# Altium PCB Monitor_Board_Model_H201.PcbDoc (part 2 of 5)
Units mm, origin at the board's own origin, x right, y up, seen from the top; angles counter-clockwise.
Board outline 50 x 40 mm, 6 copper layers (1-SIG-TOP, 2-GND, 3-PWR, 4-SIG-HOR, 5-SIG-VERT, 6-GND-BOT), stack 1.17 mm thick; 210 components, 140 nets, 699 pads, 51 vias.
Unrouted connection lines stored in the file: 491.
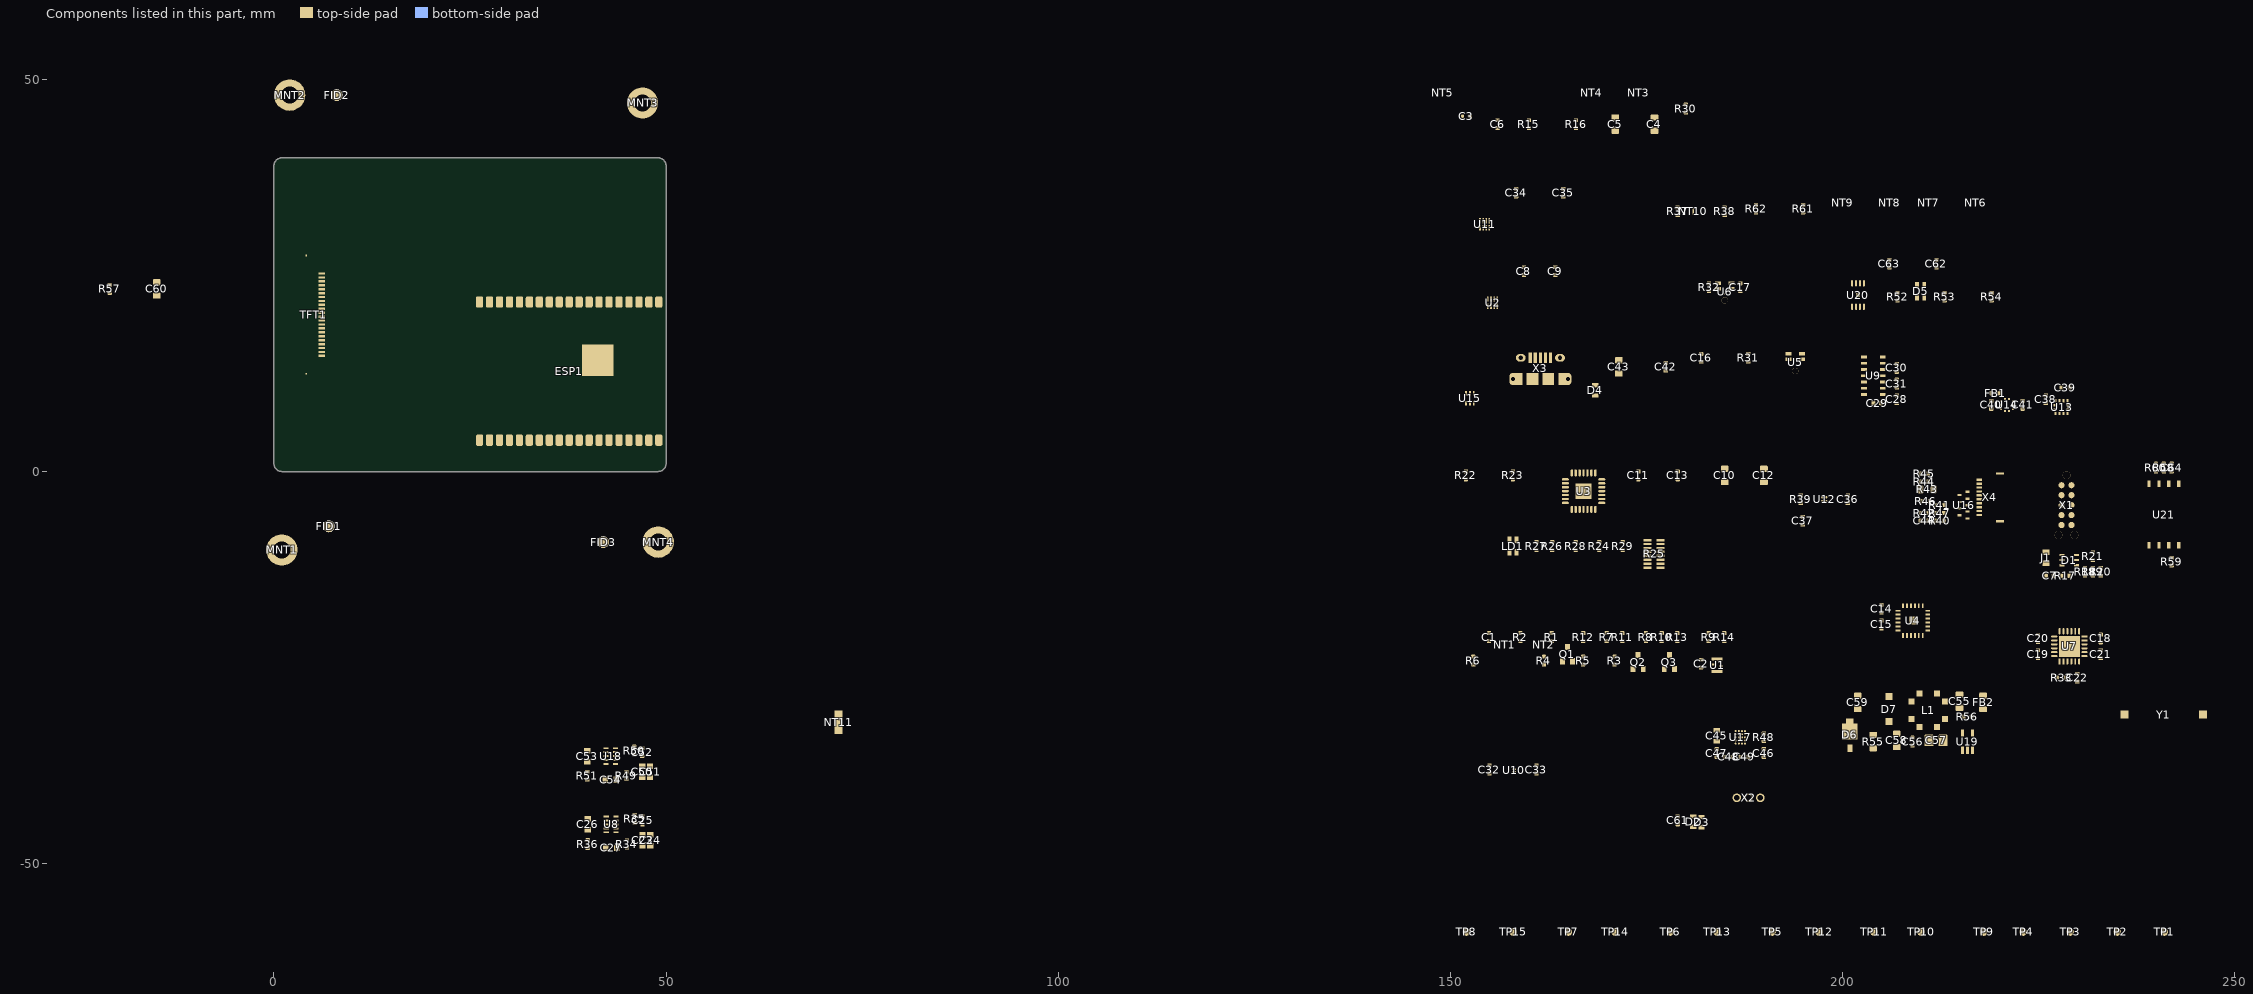
[diagram p6: the components of this part, seen from the top]

## Part data
C1 C2 C15 C16 C17 C22 C28 C30 C37 C38 C39 C44 C56 C63 C64: "0.1µF ±10% 50V Ceramic Capacitor X7R 0402 (1005 Metric)", Capacitance=100nF, Case/Package=0402, Case Code (Metric)=1005, Dielectric=X7R, Manufacturer=TDK, Manufacturer Part Number=CGA2B3X7R1H104K050BB, Max Operating Temperature=125°C, Min Operating Temperature=-55°C, Package Quantity=1, Ratings=AEC-Q200, Supplier Part Number 1=445-6899-1-ND, Tolerance=10%, Voltage=50V, Case Code (Imperial)=0402, ComponentLink1Description=http://product.tdk.com/capacitor/mlcc/en/documents/mlccspec_automotive_general_midvoltage_en.pdf?src-supplier=Future+Electronics, ComponentLink1URL=http://product.tdk.com/capacitor/mlcc/en/documents/mlccspec_automotive_general_midvoltage_en.pdf?src-supplier=Future+Electronics, ComponentLink2Description=http://www.farnell.com/datasheets/1807242.pdf?src-supplier=Element14, ComponentLink2URL=http://www.farnell.com/datasheets/1807242.pdf?src-supplier=Element14, ComponentLink3Description=http://www.mouser.com/ds/2/400/lcc_automotive_general_en-843974.pdf?src-supplier=Mouser, ComponentLink3URL=http://www.mouser.com/ds/2/400/lcc_automotive_general_en-843974.pdf?src-supplier=Mouser, ComponentLink4Description=http://www.farnell.com/datasheets/1936565.pdf?src-supplier=Element14, ComponentLink4URL=http://www.farnell.com/datasheets/1936565.pdf?src-supplier=Element14, ComponentLink5Description=http://www.farnell.com/datasheets/1735392.pdf?src-supplier=Element14, ComponentLink5URL=http://www.farnell.com/datasheets/1735392.pdf?src-supplier=Element14, Composition=Ceramic, Depth=0.5mm, Height=0.5mm, Lead Free="Lead Free", Length=1mm, Mount="Surface Mount", Packaging="Tape and Reel", Pricing 1="1=0.17, 10=0.118, 50=0.0668, 100=0.0553, 500=0.0388, 1000=0.0321, 2500=0.0299, 5000=0.0273 (USD)", REACH SVHC="No SVHC", Stock 1=2925303, Supplier 1=Digi-Key, Termination=SMD/SMT, Thickness=0.022inch, Voltage Rating=50V, Voltage Rating (DC)=50V, Weight=2.3E-05oz, Width=0.02inch
  C2: ClassName=MCU
C3 C7: "1µF ±10% 6.3V Ceramic Capacitor X5R 0402 (1005 Metric)", Capacitance=1uF, Case/Package=0402, Case Code (Metric)=1005, Dielectric=X5R, Dielectric Material=Ceramic, Manufacturer=Yageo, Manufacturer Part Number=CC0402KRX5R5BB105, Max Operating Temperature=85°C, Min Operating Temperature=-55°C, Package Quantity=1, Supplier Part Number 1=311-1438-1-ND, Tolerance=10%, Voltage Rating=6.3V, Case Code (Imperial)=0402, ComponentLink1Description=http://www.farnell.com/datasheets/70765.pdf?src-supplier=Farnell, ComponentLink1URL=http://www.farnell.com/datasheets/70765.pdf?src-supplier=Farnell, ComponentLink2Description=http://www.yageo.com/documents/recent/UPY-GPHC_X5R_4V-to-50V_25.pdf?src-supplier=Digi-Key, ComponentLink2URL=http://www.yageo.com/documents/recent/UPY-GPHC_X5R_4V-to-50V_25.pdf?src-supplier=Digi-Key, ComponentLink3Description=http://www.farnell.com/datasheets/2167237.pdf?src-supplier=Element14, ComponentLink3URL=http://www.farnell.com/datasheets/2167237.pdf?src-supplier=Element14, ComponentLink4Description=http://www.yageo.com/documents/recent/UPY-GPHC_X5R_4V-to-50V_12.pdf?src-supplier=Avnet+Europe, ComponentLink4URL=http://www.yageo.com/documents/recent/UPY-GPHC_X5R_4V-to-50V_12.pdf?src-supplier=Avnet+Europe, ComponentLink5Description=http://www.farnell.com/datasheets/1359354.pdf?src-supplier=Element14, ComponentLink5URL=http://www.farnell.com/datasheets/1359354.pdf?src-supplier=Element14, ComponentLink6Description=http://www.farnell.com/datasheets/70765.pdf?src-supplier=Element14, ComponentLink6URL=http://www.farnell.com/datasheets/70765.pdf?src-supplier=Element14, ComponentLink7Description=http://www.yageo.com/documents/recent/UPY-GPHC_X5R_4V-to-50V_12.pdf?src-supplier=Avnet, ComponentLink7URL=http://www.yageo.com/documents/recent/UPY-GPHC_X5R_4V-to-50V_12.pdf?src-supplier=Avnet, Composition=Ceramic, Depth=0.5mm, Halogen Free="Halogen Free", Height=0.5mm, Lead Free="Lead Free", Length=1mm, Mount="Surface Mount", Number of Pins=2, Packaging="Tape and Reel", Pricing 1="1=0.1, 10=0.05, 50=0.0272, 100=0.0222, 500=0.0158, 1000=0.0124, 2500=0.0113, 5000=0.0104 (USD)", Radiation Hardening=No, REACH SVHC="No SVHC", Stock 1=34926286, Supplier 1=Digi-Key, Termination=SMD/SMT, Thickness=0.022inch, Voltage Rating (DC)=6.3V, Width=0.02inch
C4 C5 C23 C24 C26 C27 C50 C51 C53 C54 C55 C58 C59 C60: "10µF ±10% 16V Ceramic Capacitor X5R 0603 (1608 Metric)", Capacitance=10uF, Case/Package=0603, Case Code (Metric)=1608, Dielectric=X5R, Manufacturer=Murata, Manufacturer Part Number=GRM188R61C106KAALJ, Max Operating Temperature=85°C, Min Operating Temperature=-55°C, Package Quantity=10000, Supplier Part Number 1=490-12736-1-ND, Tolerance=10%, Voltage Rating=16V, Case Code (Imperial)=0603, Composition=Ceramic, Height=0.8mm, Length=0.063inch, Mount="Surface Mount", Packaging="Tape and Reel", Pricing 1="1=0.39, 10=0.271, 100=0.1628, 500=0.1221, 1000=0.1031, 2500=0.0977, 5000=0.0923 (USD)", Stock 1=5470, Supplier 1=Digi-Key, Termination=SMD/SMT, Thickness=0.037inch, Voltage Rating (DC)=16V, Weight=0.000222oz, Width=0.031inch
C6 C11 C13 C61: "0.1µF ±10% 16V Ceramic Capacitor X7R 0402 (1005 Metric)", Capacitance=100nF, Case Code (Imperial)=0402, Case Code (Metric)=1005, Dielectric=X7R, Manufacturer=Yageo, Manufacturer Part Number=CC0402KRX7R7BB104, Max Operating Temperature=125°C, Min Operating Temperature=-55°C, Package Quantity=1, Supplier Part Number 1=311-1338-1-ND, Tolerance=10%, Voltage=16V, ComponentLink1Description=http://www.yageo.com/documents/recent/UPY-GPHC_X7R_6.3V-to-50V_8.pdf?src-supplier=Avnet+Europe, ComponentLink1URL=http://www.yageo.com/documents/recent/UPY-GPHC_X7R_6.3V-to-50V_8.pdf?src-supplier=Avnet+Europe, ComponentLink2Description=http://www.yageo.com/documents/recent/UPY-GPHC_X7R_6.3V-to-50V_18.pdf?src-supplier=Digi-Key, ComponentLink2URL=http://www.yageo.com/documents/recent/UPY-GPHC_X7R_6.3V-to-50V_18.pdf?src-supplier=Digi-Key, ComponentLink3Description=http://www.yageo.com/documents/recent/UPY-GPHC_X7R_6.3V-to-50V_8.pdf?src-supplier=Avnet, ComponentLink3URL=http://www.yageo.com/documents/recent/UPY-GPHC_X7R_6.3V-to-50V_8.pdf?src-supplier=Avnet, ComponentLink4Description=http://www.yageo.com/documents/recent/UPY-GPHC_X7R_6.3V-to-50V_18.pdf?src-supplier=Mouser, ComponentLink4URL=http://www.yageo.com/documents/recent/UPY-GPHC_X7R_6.3V-to-50V_18.pdf?src-supplier=Mouser, ComponentLink5Description=http://www.farnell.com/datasheets/2167236.pdf?src-supplier=Element14, ComponentLink5URL=http://www.farnell.com/datasheets/2167236.pdf?src-supplier=Element14, ComponentLink6Description=http://www.farnell.com/datasheets/1489800.pdf?src-supplier=Element14, ComponentLink6URL=http://www.farnell.com/datasheets/1489800.pdf?src-supplier=Element14, Composition=Ceramic, Depth=0.5mm, Halogen Free="Halogen Free", Height=0.5mm, Lead Free="Lead Free", Length=1mm, Mount="Surface Mount", Number of Pins=2, Order=CC0402KRX7R7BB104, Packaging="Tape and Reel", Pricing 1="1=0.1, 10=0.031, 100=0.0136, 500=0.0097, 1000=0.0077, 2500=0.007, 5000=0.0064 (USD)", Radiation Hardening=No, REACH SVHC="No SVHC", Revision="July-2002: Re-released for DXP Platform.", Stock 1=25916830, Supplier 1=Digi-Key, Termination=SMD/SMT, Thickness=0.022inch, Voltage Rating=16V, Voltage Rating (DC)=16V, Width=0.02inch
C8 C9 C34 C35: library part "CAP CER 0.1UF 50V X7R 0402", "0.1µF ±10% 50V Ceramic Capacitor X7R 0402 (1005 Metric)", Capacitance=100nF, Case/Package=0402, Case Code (Metric)=1005, Dielectric=X7R, Manufacturer=TDK, Max Operating Temperature=125°C, Min Operating Temperature=-55°C, Package Quantity=1, Ratings=AEC-Q200, Supplier Part Number 1=445-6899-1-ND, Tolerance=10%, Voltage=50V, Case Code (Imperial)=0402, ComponentLink1Description=http://product.tdk.com/capacitor/mlcc/en/documents/mlccspec_automotive_general_midvoltage_en.pdf?src-supplier=Future+Electronics, ComponentLink1URL=http://product.tdk.com/capacitor/mlcc/en/documents/mlccspec_automotive_general_midvoltage_en.pdf?src-supplier=Future+Electronics, ComponentLink2Description=http://www.farnell.com/datasheets/1807242.pdf?src-supplier=Element14, ComponentLink2URL=http://www.farnell.com/datasheets/1807242.pdf?src-supplier=Element14, ComponentLink3Description=http://www.mouser.com/ds/2/400/lcc_automotive_general_en-843974.pdf?src-supplier=Mouser, ComponentLink3URL=http://www.mouser.com/ds/2/400/lcc_automotive_general_en-843974.pdf?src-supplier=Mouser, ComponentLink4Description=http://www.farnell.com/datasheets/1936565.pdf?src-supplier=Element14, ComponentLink4URL=http://www.farnell.com/datasheets/1936565.pdf?src-supplier=Element14, ComponentLink5Description=http://www.farnell.com/datasheets/1735392.pdf?src-supplier=Element14, ComponentLink5URL=http://www.farnell.com/datasheets/1735392.pdf?src-supplier=Element14, Composition=Ceramic, Depth=0.5mm, Height=0.5mm, Lead Free="Lead Free", Length=1mm, Manufacturer Part Number=CGA2B3X7R1H104K050BB, Mount="Surface Mount", Packaging="Tape and Reel", Pricing 1="1=0.17, 10=0.118, 50=0.0668, 100=0.0553, 500=0.0388, 1000=0.0321, 2500=0.0299, 5000=0.0273 (USD)", REACH SVHC="No SVHC", Stock 1=2925303, Supplier 1=Digi-Key, Termination=SMD/SMT, Thickness=0.022inch, Voltage Rating=50V, Voltage Rating (DC)=50V, Weight=2.3E-05oz, Width=0.02inch
C10 C12: "4.7µF ±10% 16V Ceramic Capacitor X5R 0603 (1608 Metric)", Capacitance=4.7uF, Case/Package=0603, Case Code (Metric)=1608, Dielectric=X5R, Manufacturer=Yageo, Manufacturer Part Number=CC0603KRX5R7BB475, Max Operating Temperature=85°C, Min Operating Temperature=-55°C, Supplier Part Number 1=311-1785-1-ND, Tolerance=10%, Voltage Rating=16V, Case Code (Imperial)=0603, ComponentLink1Description=http://www.mouser.com/ds/2/447/UPY-GPHC_X5R_4V-to-50V_25-1131599.pdf?src-supplier=Mouser, ComponentLink1URL=http://www.mouser.com/ds/2/447/UPY-GPHC_X5R_4V-to-50V_25-1131599.pdf?src-supplier=Mouser, ComponentLink2Description=http://www.yageo.com/documents/recent/UPY-GPHC_X5R_4V-to-50V_25.pdf?src-supplier=Digi-Key, ComponentLink2URL=http://www.yageo.com/documents/recent/UPY-GPHC_X5R_4V-to-50V_25.pdf?src-supplier=Digi-Key, ComponentLink3Description=http://components.arrow.com/part/dataview/0323_04166500?src-supplier=Arrow+Europe, ComponentLink3URL=http://components.arrow.com/part/dataview/0323_04166500?src-supplier=Arrow+Europe, Composition=Ceramic, Depth=0.8mm, Halogen Free="Halogen Free", Height=0.8mm, Lead Free="Lead Free", Length=1.6mm, Mount="Surface Mount", Packaging="Tape and Reel", Pricing 1="1=0.5, 10=0.355, 50=0.2688, 100=0.2341 (USD)", Stock 1=332229, Supplier 1=Digi-Key, Termination=SMD/SMT, Thickness=0.037inch, Voltage Rating (DC)=16V, Weight=7.1E-05oz, Width=0.8mm
C14 C32 C33 C49: "2.2µF ±20% 6.3V Ceramic Capacitor X5R 0402 (1005 Metric)", Capacitance=2.2uF, Case/Package=0402, Case Code (Metric)=1005, Dielectric=X5R, Manufacturer=Murata, Manufacturer Part Number=GRM155R60J225ME15D, Max Operating Temperature=85°C, Min Operating Temperature=-55°C, Package Quantity=10000, Supplier Part Number 1=490-4519-1-ND, Tolerance=20%, Voltage=6.3V, Case Code (Imperial)=0402, ComponentLink1Description=https://www.murata.com/~/media/webrenewal/support/library/catalog/products/capacitor/mlcc/c02e.ashx?la=en-us&src-supplier=Digi-Key, ComponentLink1URL=https://www.murata.com/~/media/webrenewal/support/library/catalog/products/capacitor/mlcc/c02e.ashx?la=en-us&src-supplier=Digi-Key, ComponentLink2Description=http://www.murata.com/~/media/webrenewal/support/library/catalog/products/capacitor/mlcc/c02e.ashx?src-supplier=Avnet, ComponentLink2URL=http://www.murata.com/~/media/webrenewal/support/library/catalog/products/capacitor/mlcc/c02e.ashx?src-supplier=Avnet, ComponentLink3Description=http://www.farnell.com/datasheets/2047859.pdf?src-supplier=Element14, ComponentLink3URL=http://www.farnell.com/datasheets/2047859.pdf?src-supplier=Element14, ComponentLink4Description=https://produktinfo.conrad.com/datenblaetter/450000-474999/450128-da-01-de-VS_KONDENS_GRM155_R60J_225ME15D.pdf?src-supplier=Conrad, ComponentLink4URL=https://produktinfo.conrad.com/datenblaetter/450000-474999/450128-da-01-de-VS_KONDENS_GRM155_R60J_225ME15D.pdf?src-supplier=Conrad, Depth=0.5mm, Height=0.5mm, Lead Free="Lead Free", Length=1mm, Material=Ceramic, Mount="Surface Mount", Packaging="Tape and Reel", Pricing 1="1=0.29, 10=0.199, 100=0.1009, 500=0.0691, 1000=0.0611, 2500=0.0584, 5000=0.0531 (USD)", Radiation Hardening=No, REACH SVHC="No SVHC", Stock 1=4444410, Supplier 1=Digi-Key, Termination=SMD/SMT, Thickness=0.022inch, Voltage Rating=6.3V, Voltage Rating (DC)=6.3V, Width=0.02inch
C18 C21: "Cap Cer 10nF 25V X7R 10% 0402", Capacitance=10nF, Case/Package=0402, Case Code (Metric)=1005, Dielectric=X7R, Insulation Resistance=100GR, Manufacturer="Kyocera AVX", Manufacturer Part Number=04023C103KAT2A, Max Operating Temperature=125°C, Min Operating Temperature=-55°C, Package Quantity=1, Supplier Part Number 1=478-1113-1-ND, Tolerance=10%, Voltage=25V, Case Code (Imperial)=0402, ComponentLink1Description=http://www.farnell.com/datasheets/2237835.pdf?src-supplier=Element14, ComponentLink1URL=http://www.farnell.com/datasheets/2237835.pdf?src-supplier=Element14, ComponentLink2Description=http://catalogs.avx.com/SurfaceMount.pdf?src-supplier=Digi-Key, ComponentLink2URL=http://catalogs.avx.com/SurfaceMount.pdf?src-supplier=Digi-Key, ComponentLink3Description=http://www.alliedelec.com/m/d/a24bb5190bea413b2ff164816f55e87c.pdf?src-supplier=Allied+Electronics, ComponentLink3URL=http://www.alliedelec.com/m/d/a24bb5190bea413b2ff164816f55e87c.pdf?src-supplier=Allied+Electronics, ComponentLink4Description=http://uk.rs-online.com/webdocs/13ec/0900766b813ece35.pdf?src-supplier=RSComponents, ComponentLink4URL=http://uk.rs-online.com/webdocs/13ec/0900766b813ece35.pdf?src-supplier=RSComponents, Depth=0.5mm, Dissipation Factor=12.5%, Height=0.56mm, Lead Free="Lead Free", Length=1mm, Mount="Surface Mount,PCB", Packaging="Tape and Reel", Pricing 1="1=0.1, 10=0.034, 50=0.0182, 100=0.0149, 500=0.0107, 1000=0.0084, 2500=0.0076, 5000=0.007 (USD)", Radiation Hardening=No, REACH SVHC="No SVHC", Stock 1=1015537, Supplier 1=Digi-Key, Termination=SMD/SMT, Thickness=0.022inch, Voltage Rating=25V, Voltage Rating (DC)=25V, Width=0.02inch
C19: "10pF ±10% 50V Ceramic Capacitor C0G, NP0 0402 (1005 Metric)", Capacitance=10pF, Case/Package=0402, Case Code (Metric)=1005, Dielectric=C0G, Dielectric Material=Ceramic, Manufacturer=KEMET, Manufacturer Part Number=C0402C100K5GACTU, Max Operating Temperature=125°C, Min Operating Temperature=-55°C, Package Quantity=10000, Supplier Part Number 1=399-7747-1-ND, Tolerance=10%, Voltage Rating=50V, Case Code (Imperial)=0402, ComponentLink1Description=http://www.mouser.com/ds/2/212/KEM_C1003_C0G_SMD-1101588.pdf?src-supplier=Mouser, ComponentLink1URL=http://www.mouser.com/ds/2/212/KEM_C1003_C0G_SMD-1101588.pdf?src-supplier=Mouser, Depth=0.5mm, Dissipation Factor=0.1%, Height=0.5mm, Lead Free="Lead Free", Lead Pitch=0.3mm, Length=1mm, Mount="Surface Mount", Packaging="Tape and Reel", Pricing 1="1=0.1, 10=0.021, 50=0.0116, 100=0.0095, 500=0.0068, 1000=0.0053, 2500=0.0048, 5000=0.0045 (USD)", Radiation Hardening=No, REACH SVHC="No SVHC", Stock 1=57093, Supplier 1=Digi-Key, Termination=SMD/SMT, Thickness=0.022inch, Voltage Rating (DC)=50V, Width=0.02inch
C20: "100pF ±5% 50V Ceramic Capacitor C0G, NP0 0402 (1005 Metric)", Capacitance=100pF, Case/Package=0402, Case Code (Metric)=1005, Dielectric=C0G, Dielectric Material=Ceramic, Insulation Resistance=100GR, Manufacturer=Yageo, Manufacturer Part Number=CC0402JRNPO9BN101, Max Operating Temperature=125°C, Min Operating Temperature=-55°C, Package Quantity=1, Supplier Part Number 1=311-1024-1-ND, Temperature Coefficient=30ppm/°C, Tolerance=5%, Voltage=50V, Case Code (Imperial)=0402, ComponentLink1Description=http://www.farnell.com/datasheets/2213336.pdf?src-supplier=Newark, ComponentLink1URL=http://www.farnell.com/datasheets/2213336.pdf?src-supplier=Newark, ComponentLink2Description=http://www.yageo.com/documents/recent/UPY-GP_NP0_16V-to-50V_16.pdf?src-supplier=Digi-Key, ComponentLink2URL=http://www.yageo.com/documents/recent/UPY-GP_NP0_16V-to-50V_16.pdf?src-supplier=Digi-Key, ComponentLink3Description=http://documents.rs-components.com/techlib://itc_doclist_GB.htm?stockno=6698684&src-supplier=RSComponents, ComponentLink3URL=http://documents.rs-components.com/techlib://itc_doclist_GB.htm?stockno=6698684&src-supplier=RSComponents, ComponentLink4Description=http://www.yageo.com/documents/recent/UPY-GP_NP0_16V-to-50V_8.pdf?src-supplier=Avnet+Europe, ComponentLink4URL=http://www.yageo.com/documents/recent/UPY-GP_NP0_16V-to-50V_8.pdf?src-supplier=Avnet+Europe, ComponentLink5Description=http://www.farnell.com/datasheets/1443161.pdf?src-supplier=Element14, ComponentLink5URL=http://www.farnell.com/datasheets/1443161.pdf?src-supplier=Element14, ComponentLink6Description=http://www.farnell.com/datasheets/2213336.pdf?src-supplier=Element14, ComponentLink6URL=http://www.farnell.com/datasheets/2213336.pdf?src-supplier=Element14, Composition=Ceramic, Depth=0.5mm, Height=0.5mm, Lead Free="Lead Free", Length=1mm, Mount="Surface Mount", Number of Pins=2, Packaging="Tape and Reel", Pricing 1="1=0.1, 10=0.02, 100=0.0089, 500=0.0064, 1000=0.005, 2500=0.0046, 5000=0.0042 (USD)", Radiation Hardening=No, REACH SVHC="No SVHC", Stock 1=4235236, Supplier 1=Digi-Key, Termination=SMD/SMT, Thickness=0.022inch, Voltage Rating=50V, Voltage Rating (DC)=50V, Width=0.5mm
C25 C52: "100pF ±5% 50V Ceramic Capacitor C0G, NP0 0402 (1005 Metric)", Capacitance=100pF, Case/Package=0402, Case Code (Metric)=1005, Dielectric=C0G, Dielectric Material=Ceramic, Insulation Resistance=100GR, Manufacturer=Yageo, Manufacturer Part Number=CC0402JRNPO9BN101, Max Operating Temperature=125°C, Min Operating Temperature=-55°C, Package Quantity=1, Supplier Part Number 1=311-1024-6-ND, Temperature Coefficient=30ppm/°C, Tolerance=5%, Voltage=50V, Case Code (Imperial)=0402, ComponentLink1Description=http://www.farnell.com/datasheets/2213336.pdf?src-supplier=Newark, ComponentLink1URL=http://www.farnell.com/datasheets/2213336.pdf?src-supplier=Newark, ComponentLink2Description=http://www.yageo.com/documents/recent/UPY-GP_NP0_16V-to-50V_16.pdf?src-supplier=Digi-Key, ComponentLink2URL=http://www.yageo.com/documents/recent/UPY-GP_NP0_16V-to-50V_16.pdf?src-supplier=Digi-Key, ComponentLink3Description=http://documents.rs-components.com/techlib://itc_doclist_GB.htm?stockno=6698684&src-supplier=RSComponents, ComponentLink3URL=http://documents.rs-components.com/techlib://itc_doclist_GB.htm?stockno=6698684&src-supplier=RSComponents, ComponentLink4Description=http://www.yageo.com/documents/recent/UPY-GP_NP0_16V-to-50V_8.pdf?src-supplier=Avnet+Europe, ComponentLink4URL=http://www.yageo.com/documents/recent/UPY-GP_NP0_16V-to-50V_8.pdf?src-supplier=Avnet+Europe, ComponentLink5Description=http://www.farnell.com/datasheets/1443161.pdf?src-supplier=Element14, ComponentLink5URL=http://www.farnell.com/datasheets/1443161.pdf?src-supplier=Element14, ComponentLink6Description=http://www.farnell.com/datasheets/2213336.pdf?src-supplier=Element14, ComponentLink6URL=http://www.farnell.com/datasheets/2213336.pdf?src-supplier=Element14, Composition=Ceramic, Depth=0.5mm, Height=0.5mm, Lead Free="Lead Free", Length=1mm, Mount="Surface Mount", Number of Pins=2, Packaging="Tape and Reel", Pricing 1="1=0.1, 10=0.02, 100=0.0089, 500=0.0064, 1000=0.005, 2500=0.0046, 5000=0.0042 (USD)", Radiation Hardening=No, REACH SVHC="No SVHC", Stock 1=3017640, Supplier 1=Digi-Key, Termination=SMD/SMT, Thickness=0.022inch, Voltage Rating=50V, Voltage Rating (DC)=50V, Width=0.5mm
C29 C47: "4.7µF ±20% 6.3V Ceramic Capacitor X5R 0402 (1005 Metric)", Capacitance=4.7uF, Case/Package=0402, Case Code (Metric)=1005, Manufacturer=Samsung, Manufacturer Part Number=CL05A475MQ5NRNC, Max Operating Temperature=85°C, Min Operating Temperature=-55°C, Supplier Part Number 1=1276-1056-1-ND, Tolerance=20%, Voltage Rating=6.3V, Case Code (Imperial)=0402, ComponentLink1Description=https://www.verical.com/server-webapp/html/getDatasheet?partID=359681&src-supplier=Verical, ComponentLink1URL=https://www.verical.com/server-webapp/html/getDatasheet?partID=359681&src-supplier=Verical, ComponentLink2Description=http://www1.futureelectronics.com/doc/SAMSUNG/CL05A475MQ5NRNC.pdf?src-supplier=Future+Electronics, ComponentLink2URL=http://www1.futureelectronics.com/doc/SAMSUNG/CL05A475MQ5NRNC.pdf?src-supplier=Future+Electronics, Length=0.039inch, Mount="Surface Mount", Packaging="Tape and Reel", Pricing 1="1=0.14, 10=0.099, 50=0.0564, 100=0.0467, 500=0.0327, 1000=0.0271, 2500=0.0252, 5000=0.0231 (USD)", RoHS Compliant=Yes, Series=CL, Stock 1=746765, Supplier 1=Digi-Key, Thickness=0.022inch, Width=0.02inch
C31 C46 C48: "10µF ±20% 6.3V Ceramic Capacitor X5R 0402 (1005 Metric)", Capacitance=10uF, Case/Package=0402, Case Code (Metric)=1005, Dielectric=X5R, Manufacturer=Samsung, Manufacturer Part Number=CL05A106MQ5NUNC, Max Operating Temperature=85°C, Min Operating Temperature=-55°C, Package Quantity=1, Supplier Part Number 1=1276-1451-1-ND, Tolerance=20%, Voltage Rating=6.3V, Case Code (Imperial)=0402, ComponentLink1Description=https://www.verical.com/server-webapp/html/getDatasheet?partID=355289&src-supplier=Verical, ComponentLink1URL=https://www.verical.com/server-webapp/html/getDatasheet?partID=355289&src-supplier=Verical, ComponentLink2Description=http://www1.futureelectronics.com/doc/SAMSUNG/CL05A106MQ5NUNC.pdf?src-supplier=Future+Electronics, ComponentLink2URL=http://www1.futureelectronics.com/doc/SAMSUNG/CL05A106MQ5NUNC.pdf?src-supplier=Future+Electronics, Construction=Flat, Depth=0.5mm, Height=0.5mm, Length=1mm, Mount="Surface Mount", Packaging="Tape and Reel", Pricing 1="1=0.27, 10=0.187, 50=0.1248, 100=0.1061, 500=0.0749, 1000=0.0655, 2500=0.0624, 5000=0.0577 (USD)", Radiation Hardening=No, Series=CL, Stock 1=1544395, Supplier 1=Digi-Key, Thickness=0.028inch, Width=0.02inch
C36 C62: "1µF ±10% 16V Ceramic Capacitor X5R 0402 (1005 Metric)", Capacitance=1uF, Case/Package=0402, Case Code (Metric)=1005, Dielectric=X5R, Manufacturer=Yageo, Manufacturer Part Number=CC0402KRX5R7BB105, Max Operating Temperature=85°C, Min Operating Temperature=-55°C, Supplier Part Number 1=311-1691-1-ND, Tolerance=10%, Voltage Rating=16V, Case Code (Imperial)=0402, ComponentLink1Description=http://www.yageo.com/documents/recent/UPY-GPHC_X5R_4V-to-50V_12.pdf?src-supplier=Avnet+Europe, ComponentLink1URL=http://www.yageo.com/documents/recent/UPY-GPHC_X5R_4V-to-50V_12.pdf?src-supplier=Avnet+Europe, Composition=Ceramic, Depth=0.5mm, Halogen Free="Halogen Free", Height=0.5mm, Lead Free="Lead Free", Length=1mm, Mount="Surface Mount", Packaging="Tape and Reel", Pricing 1="1=0.4, 10=0.278, 100=0.167, 500=0.1253, 1000=0.1058, 2500=0.1002, 5000=0.0947 (USD)", Radiation Hardening=No, Stock 1=1114963, Supplier 1=Digi-Key, Termination=SMD/SMT, Thickness=0.022inch, Voltage Rating (DC)=16V, Weight=2.3E-05oz, Width=0.02inch
C40 C41: "0.1µF ±10% 16V Ceramic Capacitor X7R 0402 (1005 Metric)", Capacitance=100nF, Case Code (Imperial)=0402, Case Code (Metric)=1005, Dielectric=X7R, Manufacturer=YAGEO, Manufacturer Part Number=CC0402KRX7R7BB104, Max Operating Temperature=125°C, Min Operating Temperature=-55°C, Package Quantity=1, Supplier Part Number 1=311-1338-1-ND, Tolerance=10%, Voltage=16V, ComponentLink1Description=http://www.yageo.com/documents/recent/UPY-GPHC_X7R_6.3V-to-50V_8.pdf?src-supplier=Avnet+Europe, ComponentLink1URL=http://www.yageo.com/documents/recent/UPY-GPHC_X7R_6.3V-to-50V_8.pdf?src-supplier=Avnet+Europe, ComponentLink2Description=http://www.yageo.com/documents/recent/UPY-GPHC_X7R_6.3V-to-50V_18.pdf?src-supplier=Digi-Key, ComponentLink2URL=http://www.yageo.com/documents/recent/UPY-GPHC_X7R_6.3V-to-50V_18.pdf?src-supplier=Digi-Key, ComponentLink3Description=http://www.yageo.com/documents/recent/UPY-GPHC_X7R_6.3V-to-50V_8.pdf?src-supplier=Avnet, ComponentLink3URL=http://www.yageo.com/documents/recent/UPY-GPHC_X7R_6.3V-to-50V_8.pdf?src-supplier=Avnet, ComponentLink4Description=http://www.yageo.com/documents/recent/UPY-GPHC_X7R_6.3V-to-50V_18.pdf?src-supplier=Mouser, ComponentLink4URL=http://www.yageo.com/documents/recent/UPY-GPHC_X7R_6.3V-to-50V_18.pdf?src-supplier=Mouser, ComponentLink5Description=http://www.farnell.com/datasheets/2167236.pdf?src-supplier=Element14, ComponentLink5URL=http://www.farnell.com/datasheets/2167236.pdf?src-supplier=Element14, ComponentLink6Description=http://www.farnell.com/datasheets/1489800.pdf?src-supplier=Element14, ComponentLink6URL=http://www.farnell.com/datasheets/1489800.pdf?src-supplier=Element14, Composition=Ceramic, Depth=0.5mm, Halogen Free="Halogen Free", Height=0.5mm, Lead Free="Lead Free", Length=1mm, Mount="Surface Mount", Number of Pins=2, Order=CC0402KRX7R7BB104, Packaging="Tape and Reel", Pricing 1="1=0.1, 10=0.031, 100=0.0136, 500=0.0097, 1000=0.0077, 2500=0.007, 5000=0.0064 (USD)", Radiation Hardening=No, REACH SVHC="No SVHC", Revision="July-2002: Re-released for DXP Platform.", Stock 1=25916830, Supplier 1=Digi-Key, Termination=SMD/SMT, Thickness=0.022inch, Voltage Rating=16V, Voltage Rating (DC)=16V, Width=0.02inch
C42: library part "CAP CER 0.1UF 50V X7R 0402", "0.1µF ±10% 50V Ceramic Capacitor X7R 0402 (1005 Metric)", Capacitance=100nF, Case/Package=0402, Case Code (Metric)=1005, Dielectric=X7R, Manufacturer=TDK, Manufacturer Part Number=CGA2B3X7R1H104K050BB, Max Operating Temperature=125°C, Min Operating Temperature=-55°C, Package Quantity=1, Ratings=AEC-Q200, Supplier Part Number 1=445-6899-1-ND, Tolerance=10%, Voltage=50V, Case Code (Imperial)=0402, ComponentLink1Description=http://product.tdk.com/capacitor/mlcc/en/documents/mlccspec_automotive_general_midvoltage_en.pdf?src-supplier=Future+Electronics, ComponentLink1URL=http://product.tdk.com/capacitor/mlcc/en/documents/mlccspec_automotive_general_midvoltage_en.pdf?src-supplier=Future+Electronics, ComponentLink2Description=http://www.farnell.com/datasheets/1807242.pdf?src-supplier=Element14, ComponentLink2URL=http://www.farnell.com/datasheets/1807242.pdf?src-supplier=Element14, ComponentLink3Description=http://www.mouser.com/ds/2/400/lcc_automotive_general_en-843974.pdf?src-supplier=Mouser, ComponentLink3URL=http://www.mouser.com/ds/2/400/lcc_automotive_general_en-843974.pdf?src-supplier=Mouser, ComponentLink4Description=http://www.farnell.com/datasheets/1936565.pdf?src-supplier=Element14, ComponentLink4URL=http://www.farnell.com/datasheets/1936565.pdf?src-supplier=Element14, ComponentLink5Description=http://www.farnell.com/datasheets/1735392.pdf?src-supplier=Element14, ComponentLink5URL=http://www.farnell.com/datasheets/1735392.pdf?src-supplier=Element14, Composition=Ceramic, Depth=0.5mm, Height=0.5mm, Lead Free="Lead Free", Length=1mm, Mount="Surface Mount", Packaging="Tape and Reel", Pricing 1="1=0.17, 10=0.118, 50=0.0668, 100=0.0553, 500=0.0388, 1000=0.0321, 2500=0.0299, 5000=0.0273 (USD)", REACH SVHC="No SVHC", Stock 1=2925303, Supplier 1=Digi-Key, Termination=SMD/SMT, Thickness=0.022inch, Voltage Rating=50V, Voltage Rating (DC)=50V, Weight=2.3E-05oz, Width=0.02inch
C43: library part "CAP CER 4.7UF 10V X5R 0603", "4.7µF ±10% 10V Ceramic Capacitor X5R 0603 (1608 Metric)", Capacitance=4.7uF, Case/Package=0603, Case Code (Metric)=1608, Dielectric=X5R, Manufacturer=Yageo, Manufacturer Part Number=CC0603KRX5R6BB475, Max Operating Temperature=85°C, Min Operating Temperature=-55°C, Package Quantity=1, Supplier Part Number 1=311-1455-1-ND, Tolerance=10%, Voltage Rating=10V, Case Code (Imperial)=0603, ComponentLink1Description=http://www.farnell.com/datasheets/2167237.pdf?src-supplier=Element14, ComponentLink1URL=http://www.farnell.com/datasheets/2167237.pdf?src-supplier=Element14, ComponentLink2Description=http://www.yageo.com/documents/recent/UPY-GPHC_X5R_4V-to-50V_25.pdf?src-supplier=Digi-Key, ComponentLink2URL=http://www.yageo.com/documents/recent/UPY-GPHC_X5R_4V-to-50V_25.pdf?src-supplier=Digi-Key, ComponentLink3Description=http://www.yageo.com/documents/recent/UPY-GPHC_X5R_4V-to-50V_12.pdf?src-supplier=Avnet, ComponentLink3URL=http://www.yageo.com/documents/recent/UPY-GPHC_X5R_4V-to-50V_12.pdf?src-supplier=Avnet, ComponentLink4Description=http://www.yageo.com/documents/recent/UPY-GPHC_X5R_4V-to-50V_12.pdf?src-supplier=Avnet+Europe, ComponentLink4URL=http://www.yageo.com/documents/recent/UPY-GPHC_X5R_4V-to-50V_12.pdf?src-supplier=Avnet+Europe, Composition=Ceramic, Depth=0.8mm, Halogen Free="Halogen Free", Height=0.8mm, Lead Free="Lead Free", Length=1.6mm, Mount="Surface Mount", Packaging="Tape and Reel", Pricing 1="1=0.26, 10=0.18, 100=0.102, 500=0.072, 1000=0.063 (USD)", Radiation Hardening=No, REACH SVHC=Unknown, Stock 1=325858, Supplier 1=Digi-Key, Termination=SMD/SMT, Thickness=0.035inch, Voltage Rating (DC)=10V, Width=0.8mm
C45: "1µF ±20% 25V Ceramic Capacitor X5R 0603 (1608 Metric)", Capacitance=1uF, Case/Package=0603, Case Code (Metric)=1608, Dielectric=X5R, Manufacturer=Yageo, Manufacturer Part Number=CC0603MRX5R8BB105, Max Operating Temperature=85°C, Min Operating Temperature=-55°C, Supplier Part Number 1=311-1823-1-ND, Tolerance=20%, Voltage Rating=25V, Case Code (Imperial)=0603, ComponentLink1Description=http://www.yageo.com/exep/pages/download/literatures/ProductSelectionGuide%202014_Final_2.pdf?src-supplier=Digi-Key, ComponentLink1URL=http://www.yageo.com/exep/pages/download/literatures/ProductSelectionGuide%202014_Final_2.pdf?src-supplier=Digi-Key, ComponentLink2Description=http://www.yageo.com/documents/recent/UPY-GPHC_X5R_4V-to-50V_25.pdf?src-supplier=Digi-Key, ComponentLink2URL=http://www.yageo.com/documents/recent/UPY-GPHC_X5R_4V-to-50V_25.pdf?src-supplier=Digi-Key, Halogen Free="Halogen Free", Lead Free="Lead Free", Length=0.063inch, Mount="Surface Mount", Packaging="Tape and Reel", Pricing 1="1=0.13, 10=0.093, 50=0.0528, 100=0.0438, 500=0.0307, 1000=0.0254 (USD)", Stock 1=31570, Supplier 1=Digi-Key, Thickness=0.035inch, Voltage Rating (DC)=25V, Width=0.031inch
C57: "10µF ±10% 16V Ceramic Capacitor X7R 0805 (2012 Metric)", Capacitance=10uF, Case/Package=0805, Case Code (Metric)=2012, Dielectric=X7R, Manufacturer=Samsung, Manufacturer Part Number=CL21B106KOQNNNG, Max Operating Temperature=125°C, Min Operating Temperature=-55°C, Package Quantity=3000, Supplier Part Number 1=1276-6472-1-ND, Tolerance=10%, Voltage Rating=16V, Case Code (Imperial)=0805, ComponentLink1Description=http://www.samsungsem.com/kr/support/product-search/mlcc/CL21B106KOQNNNG.jsp?src-supplier=Digi-Key, ComponentLink1URL=http://www.samsungsem.com/kr/support/product-search/mlcc/CL21B106KOQNNNG.jsp?src-supplier=Digi-Key, ComponentLink2Description=https://produktinfo.conrad.com/datenblaetter/450000-474999/454918-da-01-en-VS_KONDENSATOR_0805.pdf?src-supplier=Conrad, ComponentLink2URL=https://produktinfo.conrad.com/datenblaetter/450000-474999/454918-da-01-en-VS_KONDENSATOR_0805.pdf?src-supplier=Conrad, Depth=1.25mm, Lead Free="Lead Free", Length=0.079inch, Material=Ceramic, Mount="Surface Mount", Packaging="Tape and Reel", Pricing 1="1=0.3, 10=0.207, 100=0.1173, 500=0.0828, 1000=0.0725 (USD)", Stock 1=251380, Supplier 1=Digi-Key, Thickness=0.055inch, Width=0.049inch
D1: library part "TVS DIODE 5V 12.5V 5CH SC88", "12.5V Clamp 8A (8/20µs) Ipp Tvs Diode Surface Mount SC-88/SC70-6/SOT-363", Breakdown Voltage=6.2V, Capacitance=130pF, Case/Package=SC, Clamping Voltage=12.5V, Leakage Current=5uA, Manufacturer="ON Semiconductor", Max Breakdown Voltage=7.2V, Max Operating Temperature=125°C, Max Output Current=8A, Max Power Dissipation=100W, Min Operating Temperature=-40°C, Package Quantity=1, Power Line Protection=No, Reverse Standoff Voltage=5V, Supplier Part Number 1=SMF05CT1GOSCT-ND, Test Current=1mA, ComponentLink1Description=http://www.farnell.com/datasheets/1708354.pdf?src-supplier=Element14, ComponentLink1URL=http://www.farnell.com/datasheets/1708354.pdf?src-supplier=Element14, ComponentLink2Description=http://www.onsemi.com/pub/Collateral/SMF05C-D.PDF?src-supplier=Digi-Key, ComponentLink2URL=http://www.onsemi.com/pub/Collateral/SMF05C-D.PDF?src-supplier=Digi-Key, ComponentLink3Description=http://www.mouser.com/ds/2/308/SMF05C-D-100912.pdf?src-supplier=Mouser, ComponentLink3URL=http://www.mouser.com/ds/2/308/SMF05C-D-100912.pdf?src-supplier=Mouser, ComponentLink4Description=http://www.onsemi.com/pub/Collateral/SMF05C-D.PDF?src-supplier=Avnet, ComponentLink4URL=http://www.onsemi.com/pub/Collateral/SMF05C-D.PDF?src-supplier=Avnet, ComponentLink5Description=https://www.verical.com/server-webapp/html/getDatasheet?partID=98371&src-supplier=Verical, ComponentLink5URL=https://www.verical.com/server-webapp/html/getDatasheet?partID=98371&src-supplier=Verical, Composition=Zener, Contact Plating=Tin,Matte, Depth=1.25mm, Direction=Unidirectional, Element Configuration="Common Anode", ESD Protection=Yes, Height=1mm, Lead Free="Lead Free", Length=2mm, Manufacturer Part Number=SMF05CT1G, Max Reverse Leakage Current=5uA, Max Surge Current=8A, Min Breakdown Voltage=6.2V, Mount="Surface Mount", Number of Channels=5, Number of Elements=5, Number of Pins=6, Number of Unidirectional Channels=5, Packaging="Tape and Reel", Peak Pulse Current=8A, Peak Pulse Power=100W, Polarity=Unidirectional, Power Dissipation=100W, Pricing 1="1=0.41, 10=0.307, 25=0.2768, 100=0.1459, 250=0.1444, 500=0.1293, 1000=0.1006 (USD)", Radiation Hardening=No, REACH SVHC="No SVHC", Reverse Breakdown Voltage=6.2V, Stock 1=33811, Supplier 1=Digi-Key, Termination=SMD/SMT, Voltage Rating (DC)=5V, Width=1.25mm, Working Voltage=5V
D2 D3 D4: library part "TVS DIODE ESDA7P120-1U1M 5.5V 11.5V 1610", "11.5V Clamp 120A (8/20µs) Ipp Tvs Diode Surface Mount 1610", Case/Package=0603, Case Code (Metric)=1610, Clamping Voltage=11.5V, Manufacturer=STMicroelectronics, Max Operating Temperature=150°C, Min Breakdown Voltage=6.4V, Min Operating Temperature=-55°C, Peak Pulse Current=120A, Peak Pulse Power=1.4kW, Power Line Protection=No, Reverse Standoff Voltage=5.5V, Supplier Part Number 1=497-17159-1-ND, Case Code (Imperial)=0603, ComponentLink1Description=http://www.st.com/content/ccc/resource/technical/document/datasheet/group3/5e/7c/5d/76/3f/de/45/35/DM00359316/files/DM00359316.pdf/jcr:content/translations/en.DM00359316.pdf?src-supplier=Digi-Key, ComponentLink1URL=http://www.st.com/content/ccc/resource/technical/document/datasheet/group3/5e/7c/5d/76/3f/de/45/35/DM00359316/files/DM00359316.pdf/jcr:content/translations/en.DM00359316.pdf?src-supplier=Digi-Key, ComponentLink2Description=http://www.farnell.com/datasheets/2815837.pdf?src-supplier=Newark, ComponentLink2URL=http://www.farnell.com/datasheets/2815837.pdf?src-supplier=Newark, ComponentLink3Description=http://www.farnell.com/datasheets/2815837.pdf?src-supplier=Farnell, ComponentLink3URL=http://www.farnell.com/datasheets/2815837.pdf?src-supplier=Farnell, ComponentLink4Description=http://www.farnell.com/datasheets/2815837.pdf?src-supplier=Element14, ComponentLink4URL=http://www.farnell.com/datasheets/2815837.pdf?src-supplier=Element14, Composition=Zener, Manufacturer Part Number=ESDA7P120-1U1M, Mount="Surface Mount", Number of Unidirectional Channels=1, Packaging="Cut Tape", Pricing 1="1=0.35, 10=0.287, 25=0.2624, 100=0.1647, 250=0.1629, 500=0.1525, 1000=0.1037, 2500=0.0994 (USD)", Stock 1=15775, Supplier 1=Digi-Key
D5 LD1: library part "LED RGB DIFFUSED SMD", "Red, Green, Blue (RGB) 624nm Red, 525nm Green, 470nm Blue LED Indication - Discrete 2V Red, 3.3V Green, 3.3V Blue 0606 (1616 Metric)", Case/Package=0606, Case Code (Metric)=1616, Color=Blue,Green,Red, Forward Voltage=3.3V, Manufacturer="Wurth Electronics", Supplier Part Number 1=732-11390-1-ND, Test Current=20mA, Case Code (Imperial)=0606, ComponentLink1Description=https://katalog.we-online.de/led/datasheet/150066M153000.pdf?src-supplier=Digi-Key, ComponentLink1URL=https://katalog.we-online.de/led/datasheet/150066M153000.pdf?src-supplier=Digi-Key, ComponentLink2Description=http://www.farnell.com/datasheets/2301702.pdf?src-supplier=Farnell, ComponentLink2URL=http://www.farnell.com/datasheets/2301702.pdf?src-supplier=Farnell, ComponentLink3Description=http://www.farnell.com/datasheets/2301702.pdf?src-supplier=Newark, ComponentLink3URL=http://www.farnell.com/datasheets/2301702.pdf?src-supplier=Newark, ComponentLink4Description=http://www.farnell.com/datasheets/2301702.pdf?src-supplier=Element14, ComponentLink4URL=http://www.farnell.com/datasheets/2301702.pdf?src-supplier=Element14, Dominant Wavelength=470nm, Element Configuration="Common Anode", Height=0.5mm, Length=1.6mm, Lens Size=1.6mm, Lens Style=Flat, Lens Transparency=Diffused, Luminous Intensity=180mcd, Manufacturer Part Number=150066M153000, Mount="Surface Mount", Packaging="Tape and Reel", Pricing 1="1=0.51, 50=0.415, 100=0.298, 500=0.272 (USD)", Stock 1=7810, Supplier 1=Digi-Key, Viewing Angle=120°, Width=1.6mm
D6: library part "DIODE SCHOTTKY 20V 1A STMITEFLAT", "Diode Schottky 20V 1A Surface Mount STmite Flat", Average Rectified Current=1A, Forward Voltage=440mV, Manufacturer=STMicroelectronics, Max Operating Temperature=150°C, Max Repetitive Reverse Voltage (Vrrm)=20V, Max Reverse Leakage Current=300uA, Max Surge Current=50A, Min Operating Temperature=-65°C, Package Quantity=1, Peak Reverse Current=3.9uA, Supplier Part Number 1=497-12281-1-ND, ComponentLink1Description=http://www.st.com/web/en/resource/technical/document/datasheet/CD00198749.pdf?src-supplier=Future+Electronics, ComponentLink1URL=http://www.st.com/web/en/resource/technical/document/datasheet/CD00198749.pdf?src-supplier=Future+Electronics, ComponentLink2Description=http://www.st.com/content/ccc/resource/technical/document/datasheet/b2/7e/6d/c8/81/31/4e/f2/CD00198749.pdf/files/CD00198749.pdf/jcr:content/translations/en.CD00198749.pdf?src-supplier=Digi-Key, ComponentLink2URL=http://www.st.com/content/ccc/resource/technical/document/datasheet/b2/7e/6d/c8/81/31/4e/f2/CD00198749.pdf/files/CD00198749.pdf/jcr:content/translations/en.CD00198749.pdf?src-supplier=Digi-Key, ComponentLink3Description=http://www.st.com/st-web-ui/static/active/en/resource/technical/document/datasheet/CD00198749.pdf?src-supplier=Mouser, ComponentLink3URL=http://www.st.com/st-web-ui/static/active/en/resource/technical/document/datasheet/CD00198749.pdf?src-supplier=Mouser, Element Configuration=Single, Forward Current=1A, Lead Free="Lead Free", Manufacturer Part Number=STPS120MF, Max Reverse Voltage (DC)=20V, Mount="Surface Mount", Number of Pins=2, Packaging="Tape and Reel", Peak Non-Repetitive Surge Current=50A, Pricing 1="1=0.48, 10=0.409, 100=0.3057, 500=0.2402, 1000=0.1856, 2500=0.1692, 5000=0.1583 (USD)", Radiation Hardening=No, Stock 1=3984, Supplier 1=Digi-Key
D7: library part "DIODE ZENER 3.3V 500MW SOD123", "Zener Diode ±5% Surface Mount SOD-123", Case/Package=SOD-123-2, Forward Voltage=900mV, Manufacturer=Diodes, Max Operating Temperature=150°C, Max Power Dissipation=500mW, Max Reverse Current=25uA, Min Operating Temperature=-65°C, Package Quantity=3000, Supplier Part Number 1=MMSZ5226B-FDICT-ND, Test Current=20mA, Tolerance=5%, Voltage Rating (DC)=3.3V, ComponentLink1Description=http://www.diodes.com/datasheets/ds18010.pdf?src-supplier=Avnet+Europe, ComponentLink1URL=http://www.diodes.com/datasheets/ds18010.pdf?src-supplier=Avnet+Europe, Element Configuration=Single, Height=1.35mm, Impedance=28R, Lead Free="Lead Free", Length=3.85mm, Manufacturer Part Number=MMSZ5226B-7-F, Max Reverse Leakage Current=25uA, Mount="Surface Mount", Number of Pins=2, Packaging="Tape and Reel", Power Dissipation=500mW, Power Rating=500mW, Pricing 1="1=0.19, 10=0.164, 100=0.063, 500=0.046, 1000=0.0309 (USD)", Radiation Hardening=No, Stock 1=63613, Supplier 1=Digi-Key, Termination=SMD/SMT, Voltage Tolerance=5%, Weight=0.000353oz, Width=1.7mm, Working Voltage=3.3V, Zener Current=25uA, Zener Voltage=3.3V
ESP1: library part "MOD ESP32-WROVER-E (16MB) TRACE ANT SMD", "Bluetooth, WiFi 802.11b/g/n, Bluetooth v4.2 +EDR Transceiver Module 2.4GHz ~ 2.5GHz PCB Trace Surface Mount", Manufacturer="Espressif Systems", Supplier Part Number 1=1965-ESP32-WROVER-E(16MB)CT-ND, Manufacturer Part Number=ESP32-WROVER-E(16MB), Stock 1=0, Supplier 1=Digi-Key
FB1: "1 kOhms @ 100MHz 1  Ferrite Bead 0402 (1005 Metric) 350mA 490mOhm", Case/Package=0402, Case Code (Metric)=1005, Current Rating=350mA, DC Resistance (DCR)=490mR, Manufacturer=Murata, Manufacturer Part Number=BLM15AX102SN1D, Max Operating Temperature=125°C, Min Operating Temperature=-55°C, Package Quantity=1, Supplier Part Number 1=490-5442-1-ND, Test Frequency=100MHz, Tolerance=25%, Case Code (Imperial)=0402, ComponentLink1Description=https://www.murata.com/en-us/products/productdata/8796740059166/ENFA0018.pdf?src-supplier=Digi-Key, ComponentLink1URL=https://www.murata.com/en-us/products/productdata/8796740059166/ENFA0018.pdf?src-supplier=Digi-Key, ComponentLink2Description=http://search.murata.co.jp/Ceramy/image/img/PDF/ENG/L0110S0100BLM15AX_SN.pdf?src-supplier=Future+Electronics, ComponentLink2URL=http://search.murata.co.jp/Ceramy/image/img/PDF/ENG/L0110S0100BLM15AX_SN.pdf?src-supplier=Future+Electronics, ComponentLink3Description=http://www.produktinfo.conrad.com/datenblaetter/1100000-1199999/001171674-da-01-en-CHIP_DROSSEL0402_1000R_350MA_1_0X0_5MM.pdf?src-supplier=Conrad, ComponentLink3URL=http://www.produktinfo.conrad.com/datenblaetter/1100000-1199999/001171674-da-01-en-CHIP_DROSSEL0402_1000R_350MA_1_0X0_5MM.pdf?src-supplier=Conrad, ComponentLink4Description=http://www.produktinfo.conrad.com/datenblaetter/1100000-1199999/001172166-da-01-en-DROSSEL_0402_1000R_31_0X0_5MM_10000ST.pdf?src-supplier=Conrad, ComponentLink4URL=http://www.produktinfo.conrad.com/datenblaetter/1100000-1199999/001172166-da-01-en-DROSSEL_0402_1000R_31_0X0_5MM_10000ST.pdf?src-supplier=Conrad, Depth=0.5mm, Height=0.5mm, Impedance=1kR, Lead Free="Lead Free", Length=1mm, Material=Ferrite,Steel, Max Current Rating=350mA, Max DC Current=350mA, Number of Circuits=1, Number of Lines=1, Number of Pins=2, Packaging="Tape and Reel", Pricing 1="1=0.11, 10=0.09, 25=0.0812, 50=0.0596, 100=0.0514, 250=0.0406, 500=0.0343, 1000=0.0289, 5000=0.0257 (USD)", REACH SVHC="No SVHC", Stock 1=138597, Supplier 1=Digi-Key, Termination=SMD/SMT, Width=0.5mm
FB2: "470 Ohms @ 100MHz 1  Ferrite Bead 0603 (1608 Metric) 500mA 210mOhm", Case/Package=0603, Case Code (Metric)=1608, Current Rating=500mA, DC Resistance (DCR)=210mR, Frequency=100MHz, Manufacturer=Murata, Manufacturer Part Number=BLM18EG471SN1D, Max Operating Temperature=125°C, Min Operating Temperature=-55°C, Package Quantity=1, Supplier Part Number 1=490-3993-6-ND, Tolerance=25%, Case Code (Imperial)=0603, ComponentLink1Description=http://uk.rs-online.com/webdocs/11b5/0900766b811b5866.pdf?src-supplier=RSComponents, ComponentLink1URL=http://uk.rs-online.com/webdocs/11b5/0900766b811b5866.pdf?src-supplier=RSComponents, ComponentLink2Description=http://www.farnell.com/datasheets/5169.pdf?src-supplier=Element14, ComponentLink2URL=http://www.farnell.com/datasheets/5169.pdf?src-supplier=Element14, ComponentLink3Description=https://www.murata.com/en-global/products/productdata/8796733767710/S0580E.pdf?src-supplier=Digi-Key, ComponentLink3URL=https://www.murata.com/en-global/products/productdata/8796733767710/S0580E.pdf?src-supplier=Digi-Key, ComponentLink4Description=https://www.distrelec.biz/Web/Downloads/_t/ds/blm-series_eng_tds.pdf?mime=application%2Fpdf&src-supplier=Distrelec, ComponentLink4URL=https://www.distrelec.biz/Web/Downloads/_t/ds/blm-series_eng_tds.pdf?mime=application%2Fpdf&src-supplier=Distrelec, ComponentLink5Description=https://www.verical.com/server-webapp/html/getDatasheet?partID=228865&src-supplier=Verical, ComponentLink5URL=https://www.verical.com/server-webapp/html/getDatasheet?partID=228865&src-supplier=Verical, ComponentLink6Description=http://search.murata.co.jp/Ceramy/image/img/PDF/ENG/L0110S0101BLM18E.pdf?src-supplier=Avnet, ComponentLink6URL=http://search.murata.co.jp/Ceramy/image/img/PDF/ENG/L0110S0101BLM18E.pdf?src-supplier=Avnet, ComponentLink7Description=http://www.produktinfo.conrad.com/datenblaetter/1100000-1199999/001171700-da-01-en-CHIP_DROSSEL0603_470R_500MA_1_6X0_8MM.pdf?src-supplier=Conrad, ComponentLink7URL=http://www.produktinfo.conrad.com/datenblaetter/1100000-1199999/001171700-da-01-en-CHIP_DROSSEL0603_470R_500MA_1_6X0_8MM.pdf?src-supplier=Conrad, ComponentLink8Description=http://www.produktinfo.conrad.com/datenblaetter/1100000-1199999/001172269-da-01-en-DROSSEL_0603_470R_1_6X0_8MM_4000ST.pdf?src-supplier=Conrad, ComponentLink8URL=http://www.produktinfo.conrad.com/datenblaetter/1100000-1199999/001172269-da-01-en-DROSSEL_0603_470R_1_6X0_8MM_4000ST.pdf?src-supplier=Conrad, Core Material=Ferrite, DC Current=500mA, Depth=0.8mm, Height=0.8mm, Impedance="470 Ohm", Lead Free="Lead Free", Length=1.6mm, Material=Ferrite,Steel, Max Current Rating=500mA, Max DC Current=500mA, Military Standard=Not, Mount="Surface Mount", Number of Circuits=1, Number of Lines=1, Number of Pins=2, Packaging="Tape and Reel", Pricing 1="1=0.23, 10=0.175, 25=0.1452, 50=0.1252, 100=0.1126, 250=0.0951, 500=0.0851, 1000=0.0726 (USD)", Radiation Hardening=No, REACH SVHC="No SVHC", Resistance=210mR, Stock 1=4285, Supplier 1=Digi-Key, Termination=SMD/SMT, Test Frequency=100MHz, Weight=7.1E-05oz, Width=0.8mm
FID1 FID2 FID3: library part Fiducial, "Fiducial mark.  There is nothing to buy or mount.", ClassName=FiducialMark, CompType=Fiducial, Manufacturer=N/A, Manufacturer Part Number=N/A, MountType=N/A, PackageReference=Fiducial
J1: "NO PCB Bridge (May be closed by a solder blob)"
L1: "6.8µH Shielded Coupled Inductors 1.2A 160mOhm Max 1919 (4.8x4.8 Metric)", Inductance="6.8 uH", Manufacturer=Coilcraft, Manufacturer Part Number=LPD5030-682MR, Maximum DC Current="1.2 A", Maximum DC Resistance="160 mOhms", Maximum Operating Temperature="+ 125 C", Minimum Operating Temperature="- 40 C", Self Resonant Frequency="40 MHz", Test Frequency="100 kHz", Tolerance="30 %", Application=Power, Brand=Coilcraft, Category="Fixed Coupled Inductors", ComponentLink1Description=https://www.coilcraft.com/en-us/products/power/coupled-inductors/1-1-shielded-coupled/msd_h/msd1048h/#, ComponentLink1URL=https://www.coilcraft.com/getmedia/492eebb2-11bb-49ba-b07b-44c830c73f93/msd1048h.pdf, Height="2.9 mm", Length="4.8 mm", Minimum Order Quantity=1, Mount="Surface Mount", Mounting Style="PCB Mount", Packaging="Cut Tape", Product="Power Inductors", Product Type="Fixed Coupled Inductors", Reeling=True, Series=LPD5030, Shielding=Shielded, Subcategory="Inductors, Chokes & Coils", Termination=-, Termination Style=SMD/SMT, Type="SMD Inductor", Width="4.8 mm"
MNT1 MNT2 MNT3 MNT4: library part MountHole_M2, "PCB Mount Hole. There is nothing to buy or mount."
NT1 NT2 NT3 NT4 NT5 NT6 NT7 NT8 NT9 NT10 NT11: library part "Net Tie Line", ClassName="Net Tie"
Q1 Q2 Q3: library part "TRANS BC847CW,115 NPN 45V 0.1A SOT323", "Bipolar (BJT) Transistor NPN 45V 100mA 100MHz 200mW Surface Mount SOT-323-3", Manufacturer=Nexperia, Supplier Part Number 1=1727-4312-1-ND, ClassName=U_ESP32-WROOM32D_Module, ComponentLink1Description=http://www.farnell.com/datasheets/1856333.pdf?src-supplier=Farnell, ComponentLink1URL=http://www.farnell.com/datasheets/1856333.pdf?src-supplier=Farnell, ComponentLink2Description=http://www.farnell.com/datasheets/1856333.pdf?src-supplier=Element14, ComponentLink2URL=http://www.farnell.com/datasheets/1856333.pdf?src-supplier=Element14, ComponentLink3Description=https://assets.nexperia.com/documents/data-sheet/BC847_SER.pdf?src-supplier=Digi-Key, ComponentLink3URL=https://assets.nexperia.com/documents/data-sheet/BC847_SER.pdf?src-supplier=Digi-Key, ComponentLink4Description=http://www.farnell.com/datasheets/1856333.pdf?src-supplier=Newark, ComponentLink4URL=http://www.farnell.com/datasheets/1856333.pdf?src-supplier=Newark, Manufacturer Part Number=BC847CW,115, Mount="Surface Mount", Pricing 1="1=0.13, 10=0.118, 25=0.1124, 100=0.0495, 250=0.0475, 500=0.0389, 1000=0.027 (USD)", Stock 1=327256, Supplier 1=Digi-Key